# Altium PCB ACDC.PcbDoc
Units mm, origin at the board's own origin, x right, y up, seen from the top; angles counter-clockwise.
Board outline 50 x 50.95 mm, 2 copper layers (TOP, BOTTOM), stack 0.35 mm thick; 6 components, 33 nets, 164 pads, 32 vias.
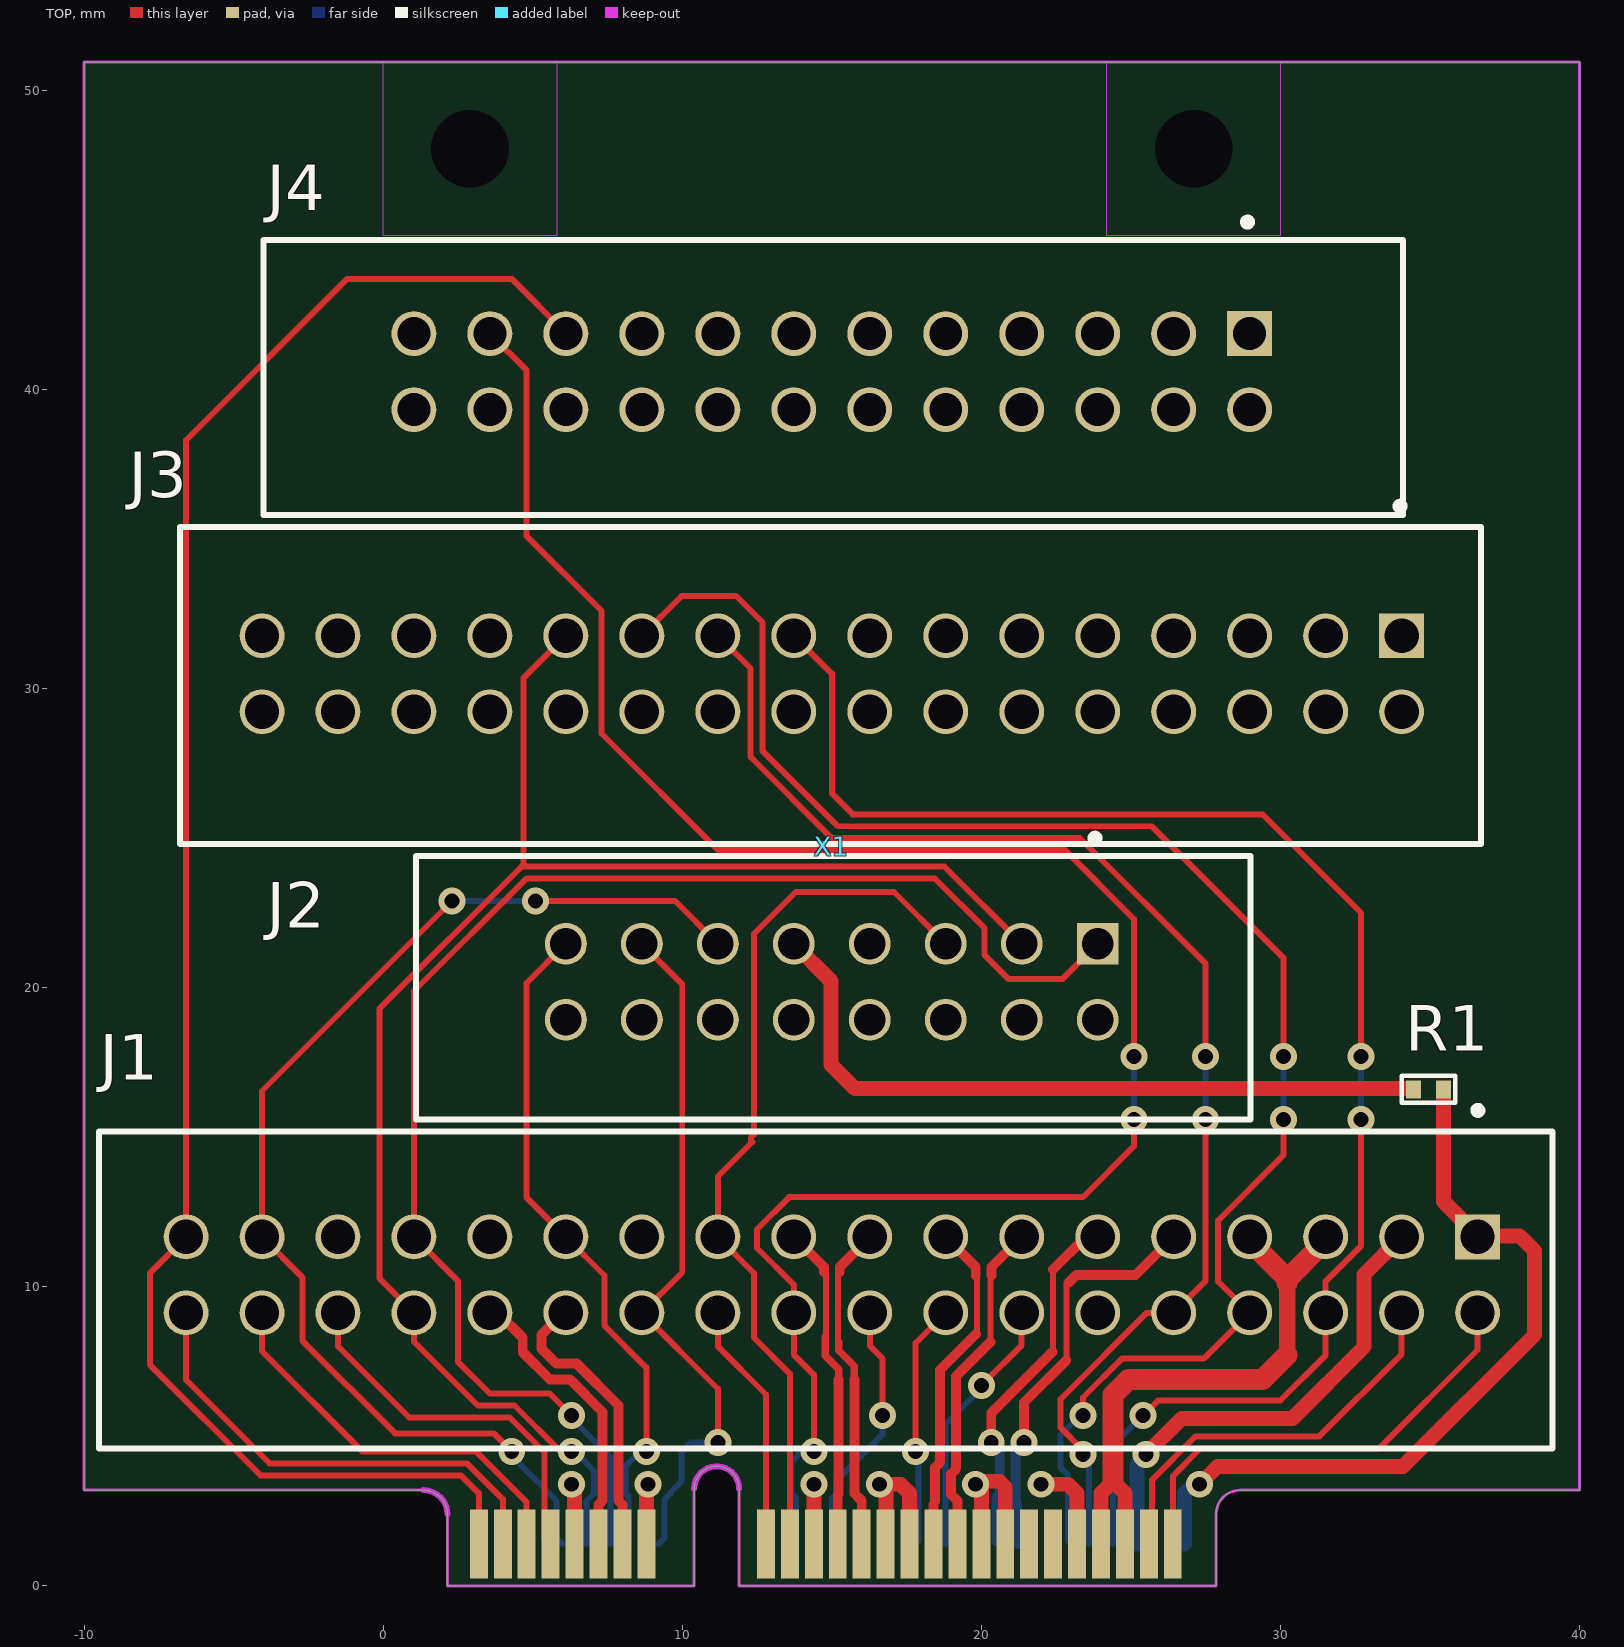
[diagram p0: TOP view]
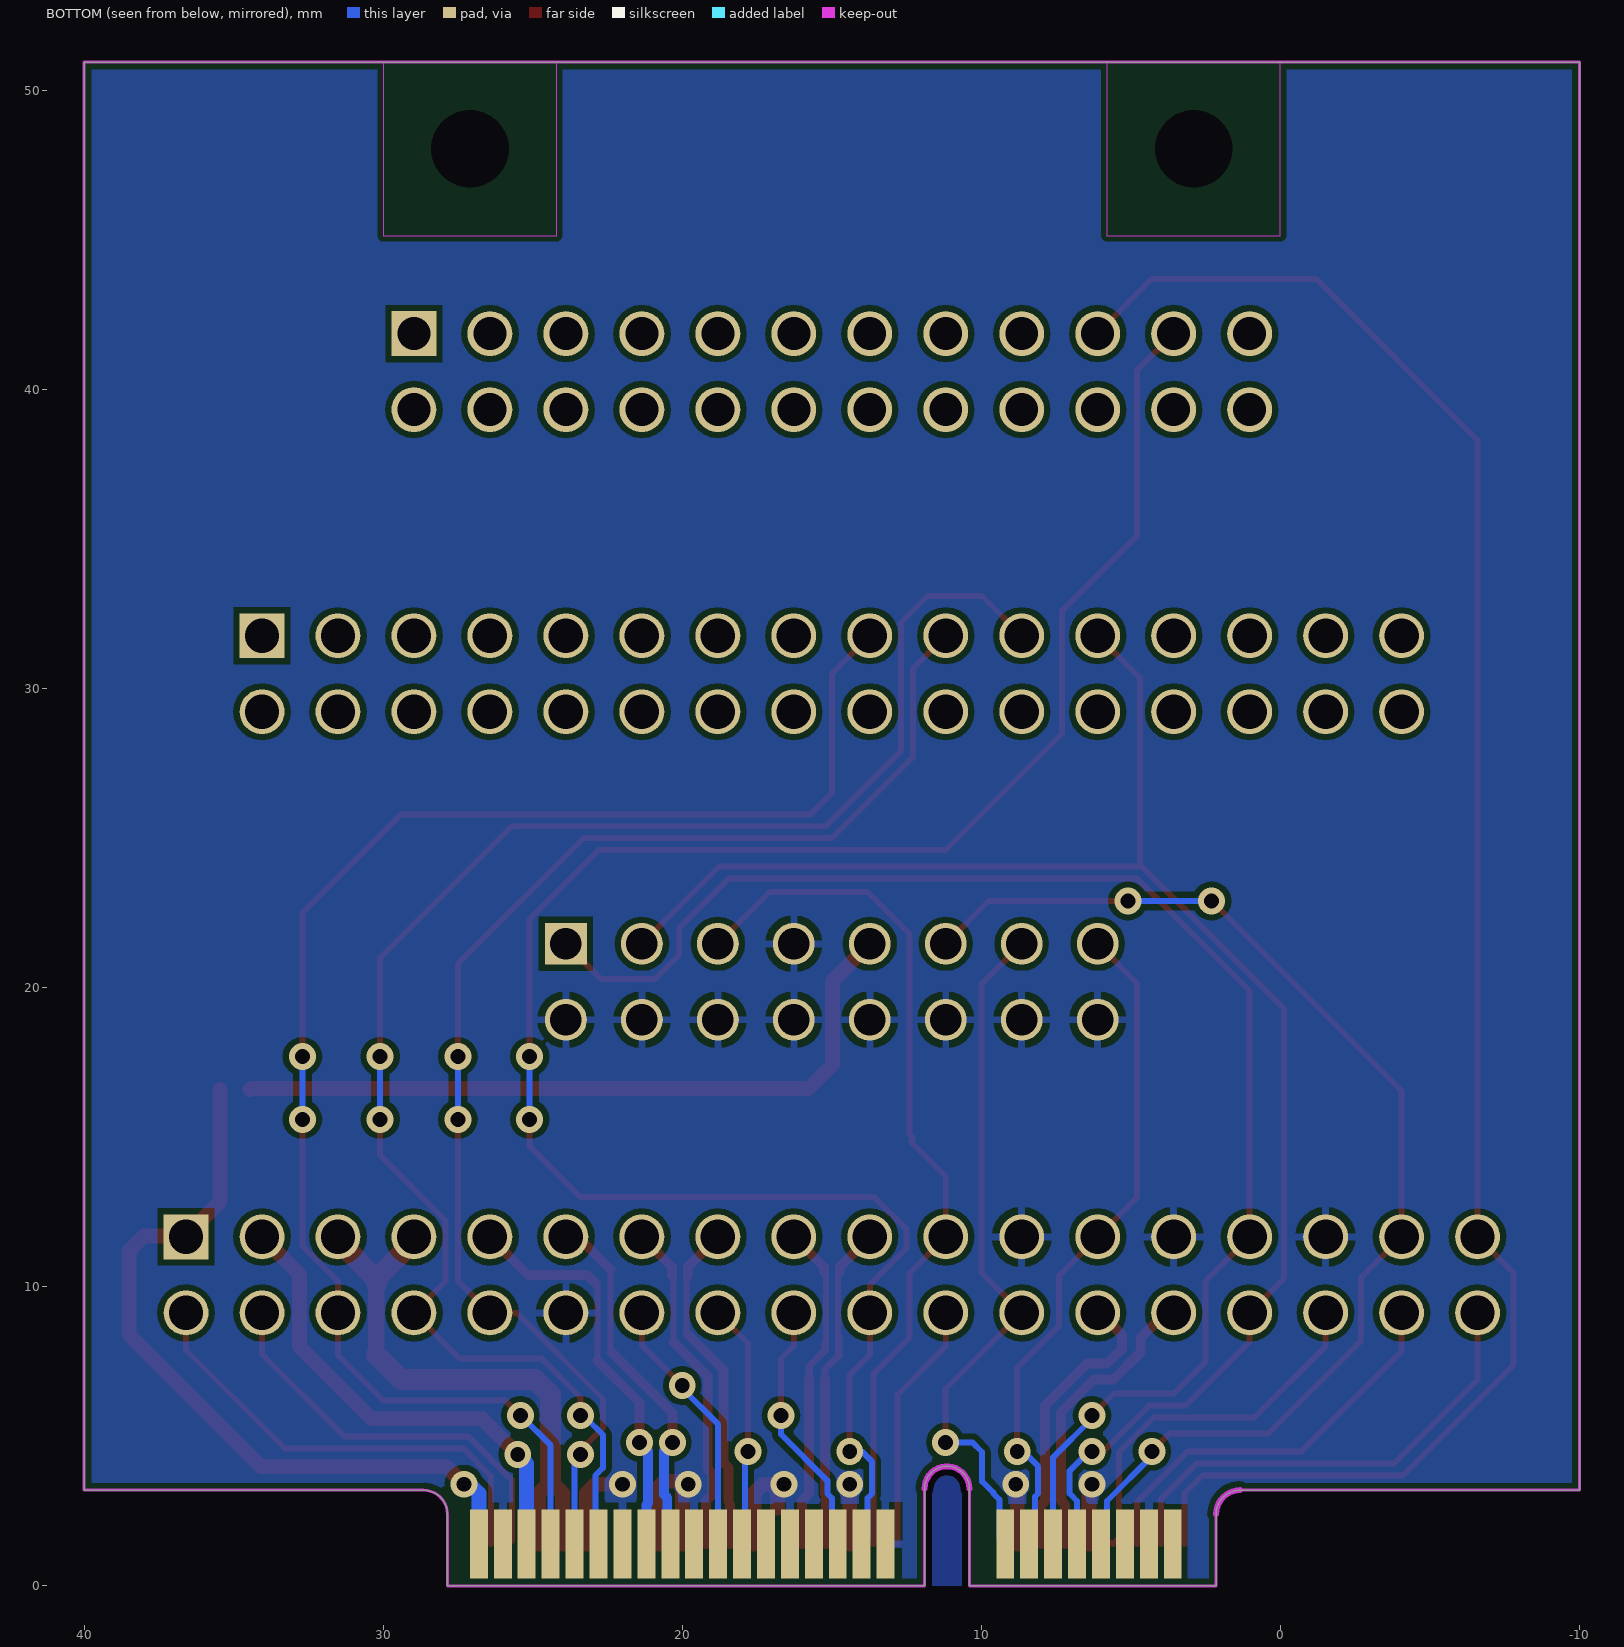
[diagram p1: BOTTOM view, seen from below]
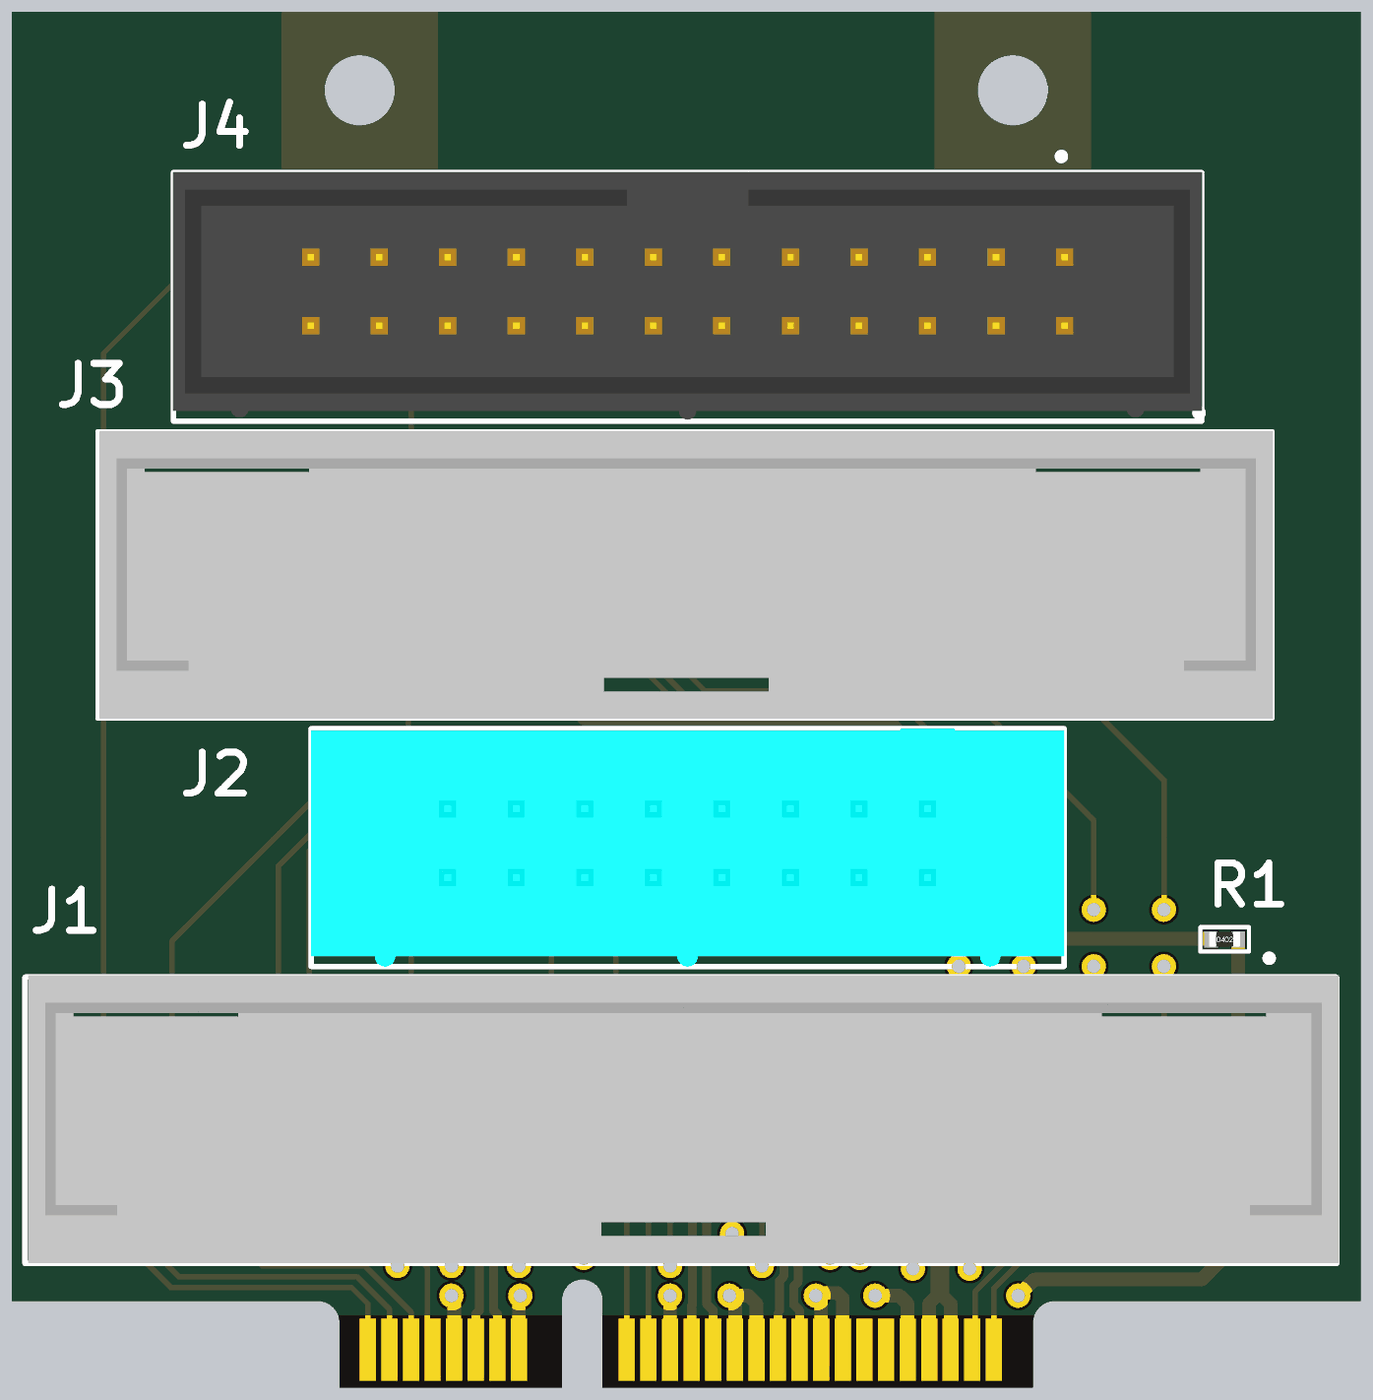
[diagram p2: 3D render of the assembled board from above, using the file's embedded part models]

## Layer stack, top to bottom
Top Solder: solder mask 0.0102, Solder Resist, Dk 3.5
TOP: signal copper 0.035
Dielectric: dielectric 0.28, Dk 4.2
BOTTOM: signal copper 0.035
Bottom Solder: solder mask 0.0102, Solder Resist, Dk 3.5

## Board outline
2.15,0 2.15,2.4 ccw(c1.35,2.4) 1.35,3.2 -10,3.2 -10,50.95 40,50.95 40,3.2 28.65,3.2 ccw(c28.65,2.4) 27.85,2.4 27.85,0 11.9,0 11.9,3.25 ccw(c11.15,3.25) 10.4,3.25 10.4,0

## Design rules (kind name [scope] priority, off if disabled: settings)
AcuteAngle [All] p1: minimum=6.00000000000000E+0001 checktracksonly=FALSE
Clearance Clearance_RF [InNetClass('50R')] p1: gap=0.4
Clearance Clearance_GPS [InNetClass('GPS')] p2: gap=0.2
Clearance [All] p3: gap=0.2
Clearance Clearance_keepout [(OnLayer('Keep-Out Layer'))] p4: gap=0.4
Clearance PolygonClearance [InNamedPolygon('5V0_L02_P032') vs InNamedPolygon('3V3_L02_P030')] p5: gap=0.3
ComponentClearance [All] p1: gap=0.15 collisioncheckmode=3 verticalgap=0.254 showdistances=FALSE
DiffPairsRouting DIFF90OHM [InNetClass('DIFF90')] p1: maxlimit=0.5 minlimit=0.2 mostfreqgap=0.2 toplayer_minwidth=0.2 toplayer_maxwidth=0.331 toplayer_prefwidth=0.331 bottomlayer_minwidth=0.2 bottomlayer_maxwidth=0.331 bottomlayer_prefwidth=0.331 maxuncoupledlength=12.7
MatchedLengths [InNetClass('DIFF90')] p1: tolerance=0.5 checknetsindiffpair=TRUE checkdiffpairvsdiffpair=FALSE checkxsignals=FALSE checkothers=FALSE
MatchedLengths USB_OTG_CON [InNetClass('USB_OTG_CON_D')] p2: tolerance=0.1 checknetsindiffpair=TRUE checkdiffpairvsdiffpair=FALSE checkxsignals=FALSE checkothers=FALSE
MatchedLengths USB_OTG_ESD [InNetClass('USB_OTG_ESD_D')] p3: tolerance=0.1 checknetsindiffpair=TRUE checkdiffpairvsdiffpair=FALSE checkxsignals=FALSE checkothers=FALSE
MatchedLengths USB_OTG_HS [InNetClass('USB_HS_D')] p4: tolerance=0.1 checknetsindiffpair=TRUE checkdiffpairvsdiffpair=FALSE checkxsignals=FALSE checkothers=FALSE
MatchedLengths USB_OTG_FS [InNetClass('USB_OTG_FS_D')] p5: tolerance=0.1 checknetsindiffpair=TRUE checkdiffpairvsdiffpair=FALSE checkxsignals=FALSE checkothers=FALSE
PlaneConnect [All] p1: planeconnectstyle=Relief reliefexpansion=0.5 reliefentries=4 reliefconductorwidth=0.25 reliefairgap=0.25
PolygonConnect MTHOLE [(HasFootprint('MTG300_600') OR HasFootprint('TP_SMD'))] p1: connectstyle=Direct reliefconductorwidth=0.254 reliefentries=4 polygonreliefangle="90 Angle" airgapwidth=0.254
PolygonConnect PAD_CONNECT [(InPadClass('All Pads'))] p2: connectstyle=Relief reliefconductorwidth=0.25 reliefentries=4 polygonreliefangle="90 Angle" airgapwidth=0.25
PolygonConnect VIA_CONNECT [All] p3: connectstyle=Direct reliefconductorwidth=0.25 reliefentries=4 polygonreliefangle="90 Angle" airgapwidth=0.25
RoomDefinition PCIExpressModule [InComponentClass('PCIExpressModule')] p1: confinementstyle=ConfineIn formatcopy=TRUE lockcomponents=FALSE outline -306.83,-273.323 -256.03,-273.323 -256.03,-247.923 -306.83,-247.923
RoutingVias [All] p1: holewidth=0.5 width=0.9 viastyle="Through Hole" minholewidth=0.5 minwidth=0.9 maxholewidth=3 maxwidth=5
SolderMaskExpansion [All] p1: expansion=0.102
Width 50ohm [InNetClass('50R')] p1: maxlimit=0.501 minlimit=0.151 preferedwidth=0.501 minimp=50.000000 maximp=50.000000 favimp=50.000000
Width [All] p2: maxlimit=5 minlimit=0.15 preferedwidth=0.151 minimp=50.000000 maximp=50.000000 favimp=50.000000
27 further rules are at their usual default settings.

## Classes and differential pairs
net class DIFF90: _USB_AUX_D_N _USB_AUX_D_P MPCI_AUX_CLK_N MPCI_AUX_CLK_P MPCI_AUX_RX_N MPCI_AUX_RX_P MPCI_AUX_TX_N MPCI_AUX_TX_P
differential pair _USB_AUX_D: +_USB_AUX_D_P -_USB_AUX_D_N
differential pair MPCI_AUX_CLK: +MPCI_AUX_CLK_P -MPCI_AUX_CLK_N
differential pair MPCI_AUX_RX: +MPCI_AUX_RX_P -MPCI_AUX_RX_N
differential pair MPCI_AUX_TX: +MPCI_AUX_TX_P -MPCI_AUX_TX_N

## Components (designator, comment, footprint, x,y, rotation, side; value= is the part's Value field where it differs from the comment)
J1 "Comment" HDR_2X18 15,10.4 r180 top locked
J2 "Comment" HDR_2X8 15,20.2 r180 top locked
J3 "Comment" HDR_2X16 15,30.5 r180 top locked
J4 "Comment" HDR_2X12 15,40.6 r180 top locked
R1 "0" RESC1005X06N 34.95,16.6 r0 top
X1 "Mini PCIe Board Edge" PCIeMini-Edge 0,3.2 r0 top locked

## Footprints (in the part's own frame and the unit in brackets; to place one, negate y for a bottom-side part, rotate by r counter-clockwise, add the part's x,y. Pads: shape width x height; smd on the part's side, far side on the other; paste and mask are expansions set on the pad)
HDR_2X8 [mm]
  rect 1.4x1.4 hole 1.05: 1(-8.89,-1.27)
  round 1.4 hole 1.05: 2(-8.89,1.27) 3(-6.35,-1.27) 4(-6.35,1.27) 5(-3.81,-1.27) 6(-3.81,1.27) 7(-1.27,-1.27) 8(-1.27,1.27) 9(1.27,-1.27) 10(1.27,1.27) 11(3.81,-1.27) 12(3.81,1.27) 13(6.35,-1.27) 14(6.35,1.27) 15(8.89,-1.27) 16(8.89,1.27)
  silkscreen extent -14,-4.92 13.9,4.6, body extent -14.01,-4.2 13.91,4.61, height 8.89
HDR_2X12 [mm]
  rect 1.5x1.5 hole 1.1: 1(-13.97,-1.27)
  round 1.5 hole 1.1: 2(-13.97,1.27) 3(-11.43,-1.27) 4(-11.43,1.27) 5(-8.89,-1.27) 6(-8.89,1.27) 7(-6.35,-1.27) 8(-6.35,1.27) 9(-3.81,-1.27) 10(-3.81,1.27) 11(-1.27,-1.27) 12(-1.27,1.27) 13(1.27,-1.27) 14(1.27,1.27) 15(3.81,-1.27) 16(3.81,1.27) 17(6.35,-1.27) 18(6.35,1.27) 19(8.89,-1.27) 20(8.89,1.27) 21(11.43,-1.27) 22(11.43,1.27) 23(13.97,-1.27) 24(13.97,1.27)
  silkscreen extent -19.1,-5.12 19,4.8, body extent -19.12,-4.42 19.02,4.75, height 8.86
HDR_2X16 [mm]
  rect 1.5x1.5 hole 1.15: 1(-19.05,-1.27)
  round 1.5 hole 1.15: 2(-19.05,1.27) 3(-16.51,-1.27) 4(-16.51,1.27) 5(-13.97,-1.27) 6(-13.97,1.27) 7(-11.43,-1.27) 8(-11.43,1.27) 9(-8.89,-1.27) 10(-8.89,1.27) 11(-6.35,-1.27) 12(-6.35,1.27) 13(-3.81,-1.27) 14(-3.81,1.27) 15(-1.27,-1.27) 16(-1.27,1.27) 17(1.27,-1.27) 18(1.27,1.27) 19(3.81,-1.27) 20(3.81,1.27) 21(6.35,-1.27) 22(6.35,1.27) 23(8.89,-1.27) 24(8.89,1.27) 25(11.43,-1.27) 26(11.43,1.27) 27(13.97,-1.27) 28(13.97,1.27) 29(16.51,-1.27) 30(16.51,1.27) 31(19.05,-1.27) 32(19.05,1.27)
  silkscreen extent -21.7,-5.72 21.8,5.7, body extent -21.74,-4.93 21.74,5.73, height 12.08
HDR_2X18 [mm]
  rect 1.5x1.5 hole 1.15: 1(-21.59,-1.27)
  round 1.5 hole 1.15: 2(-21.59,1.27) 3(-19.05,-1.27) 4(-19.05,1.27) 5(-16.51,-1.27) 6(-16.51,1.27) 7(-13.97,-1.27) 8(-13.97,1.27) 9(-11.43,-1.27) 10(-11.43,1.27) 11(-8.89,-1.27) 12(-8.89,1.27) 13(-6.35,-1.27) 14(-6.35,1.27) 15(-3.81,-1.27) 16(-3.81,1.27) 17(-1.27,-1.27) 18(-1.27,1.27) 19(1.27,-1.27) 20(1.27,1.27) 21(3.81,-1.27) 22(3.81,1.27) 23(6.35,-1.27) 24(6.35,1.27) 25(8.89,-1.27) 26(8.89,1.27) 27(11.43,-1.27) 28(11.43,1.27) 29(13.97,-1.27) 30(13.97,1.27) 31(16.51,-1.27) 32(16.51,1.27) 33(19.05,-1.27) 34(19.05,1.27) 35(21.59,-1.27) 36(21.59,1.27)
  silkscreen extent -24.1,-5.62 24.5,5.8, body extent -24.18,-4.87 24.38,5.8, height 12.08
PCIeMini-Edge [mm]
  rect 0.6x2.3 smd paste-0.9: 1(3.2,-1.8) 3(4,-1.8) 5(4.8,-1.8) 7(5.6,-1.8) 9(6.4,-1.8) 11(7.2,-1.8) 13(8,-1.8) 15(8.8,-1.8) 17(12.8,-1.8) 19(13.6,-1.8) 21(14.4,-1.8) 23(15.2,-1.8) 25(16,-1.8) 27(16.8,-1.8) 29(17.6,-1.8) 31(18.4,-1.8) 33(19.2,-1.8) 35(20,-1.8) 37(20.8,-1.8) 39(21.6,-1.8) 41(22.4,-1.8) 43(23.2,-1.8) 45(24,-1.8) 47(24.8,-1.8) 49(25.6,-1.8) 51(26.4,-1.8)
  rect 0.6x2.3 smd far side paste-0.9: 2(3.6,-1.8) 4(4.4,-1.8) 6(5.2,-1.8) 8(6,-1.8) 10(6.8,-1.8) 12(7.6,-1.8) 14(8.4,-1.8) 16(9.2,-1.8) 18(13.2,-1.8) 20(14,-1.8) 22(14.8,-1.8) 24(15.6,-1.8) 26(16.4,-1.8) 28(17.2,-1.8) 30(18,-1.8) 32(18.8,-1.8) 34(19.6,-1.8) 36(20.4,-1.8) 38(21.2,-1.8) 40(22,-1.8) 42(22.8,-1.8) 44(23.6,-1.8) 46(24.4,-1.8) 48(25.2,-1.8) 50(26,-1.8) 52(26.8,-1.8)
  round 2.3 hole 2.6 unplated: MH1(2.9,44.85) MH2(27.1,44.85)
  Keep-Out Layer region: 5.8,41.95 0,41.95 0,47.75 5.8,47.75 hole: 2.9,46.161 2.561,46.117 2.244,45.986 1.973,45.777 1.764,45.506 1.633,45.189 1.589,44.85 1.633,44.511 1.764,44.194 1.973,43.923 2.244,43.714 2.561,43.583 2.9,43.539 3.239,43.583 3.556,43.714 3.827,43.923 4.036,44.194 4.167,44.511 4.211,44.85 4.167,45.189 4.036,45.506 3.827,45.777 3.556,45.986 3.239,46.117
  Keep-Out Layer region: 24.2,41.95 24.2,47.75 30,47.75 30,41.95 hole: 28.411,44.85 28.367,45.189 28.236,45.506 28.027,45.777 27.756,45.986 27.439,46.117 27.1,46.161 26.761,46.117 26.444,45.986 26.173,45.777 25.964,45.506 25.833,45.189 25.789,44.85 25.833,44.511 25.964,44.194 26.173,43.923 26.444,43.714 26.761,43.583 27.1,43.539 27.439,43.583 27.756,43.714 28.027,43.923 28.236,44.194 28.367,44.511
RESC1005X06N [mm] "Chip Resistor, 2-Leads, Body 1,00x0,50mm, IPC Low Density"
  rect 0.5x0.6 smd mask+0.05: 1(-0.5,0) 2(0.5,0)
  silkscreen extent -0.9,-0.45 0.9,0.45, body extent -0.57,-0.27 0.58,0.28, height 0.41

## Part data
J1: library part CON_2X18
J2: library part CON_2X8
J3: library part CON_2X16
J4: library part CON_2X12
R1: library part RESC1005_0R00_5%, "RES SMD 0.0OHM JUMPER 1/16W 0402"
X1: library part CON_MPIE_EDGE

## Via types
v1: diameter 0.9, hole 0.5, TOP to BOTTOM, 32 vias

## Nets (pads, with @x,y where several pads share a name; then routed paths per layer and width w, separated by ;. In a path a pad name is that pad's centre, name@x,y a point inside that pad or via, vN(x,y) a via of type N, cw(c..) or ccw(c..) an arc to the next point about the centre after c; other vN are vias at no path point)
1V5_PCI: J1.3 X1.48 | length 16.1
  TOP w0.5: v1(25.5,4.4) 26.7,5.6 30.4,5.6 32.8,8 32.8,10.42 J1.3
  BOTTOM w0.5: X1.48 25.2,4.1 v1(25.5,4.4)
3V3_PCIE_CON_AUX: J1.1 R1.2 X1.52 | length 25.9
  TOP w0.5: v1(27.3,3.4) 27.9,4 34.1,4 38.5,8.4 38.5,11.2 38,11.7 J1.1@36.6,11.7 ; R1.2 35.45,12.85 J1.1@36.6,11.7 ; J1.1 36.6,11.68 J1.1@36.6,11.7
  BOTTOM w0.5: X1.52 26.8,3.1 27.1,3.4 v1(27.3,3.4)
5V_PCIE_CON_AUX: J1.5 J1.7 X1.45 X1.47 | length 19.8
  TOP w0.5: X1.45 24,3.1 24.4,3.5 24.8,3.1 X1.47
  TOP w0.55: 30.225,7.725 30.225,10.125
  TOP w0.7: 24.4,3.5 24.4,6.381 24.919,6.9 29.4,6.9 30.225,7.725 ; J1.7@28.97,11.53 30.225,10.275 30.225,10.125 ; 30.3,10.329 31.381,11.41 J1.5@31.51,11.41
_USB_AUX_D_N: J1.11 X1.36 | length 12.1
  TOP w0.2: 22.4,7.824 22.4,10.58 22.4,10.625
  TOP w0.331: v1(20.331,4.8) 20.331,5.782 22.373,7.824 ; 22.4,10.58 23.49,11.67 J1.11
  BOTTOM w0.331: v1(20.331,4.8) 20.616,4.516 20.616,3.062 20.5,2.947 X1.36@20.5,1.5
_USB_AUX_D_P: J1.9 X1.38 | length 13.7
  TOP w0.2: 22.84,7.54 22.84,10.065 22.907,10.132
  TOP w0.331: v1@21.5,4.869 v1(21.431,4.8) 21.431,6.131 22.84,7.54 ; 22.907,10.132 23.175,10.4 25.16,10.4 J1.9
  BOTTOM w0.331: X1.38 21.2,2.715 21.147,2.769 21.147,4.515 v1(21.431,4.8)
AUX_GPS_1PPS: J1.22 X1.17 | length 8.4
  TOP w0.2: J1.22 11.19,8.01 12.8,6.4 X1.17
CLKREQ#: J1.32 X1.7 | length 12.7
  TOP w0.2: J1.32 -1.51,8.01 0.865,5.635 4.226,5.635 5.4,4.461 5.4,1.6 X1.7 X1.7@5.65,1.45
COEX1: J1.36 X1.3 | length 16
  TOP w0.2: J1.36 -6.59,6.89 -3.8,4.1 2.8,4.1 4,2.9 X1.3
COEX2: J1.34 X1.5 | length 13.6
  TOP w0.2: J1.34 -4.05,7.85 -0.7,4.5 3.1,4.5 4.8,2.8 X1.5
GND: J1.12 J1.23 J1.27 J1.31 J2.2 J2.4 J2.6 J2.7 J2.8 J2.10 J2.12 J2.14 J2.16 X1.4 X1.9 X1.15 X1.18 X1.21 X1.26 X1.27 X1.29 X1.34 X1.35 X1.37 X1.40 X1.43 X1.50 | length 17.6
  TOP w0.25: v1@6.35,3.6 v1@6.4,3.55
  TOP w0.3: X1.29 X1.29@17.7,1.5 ; X1.43 X1.43@23.3,1.5
  TOP w0.5: X1.9 v1@6.4,3.5 ; X1.15 8.8,3.4 v1@8.9,3.5 ; X1.21 v1@14.4,3.5 ; v1(16.6,3.4) 17.3,3.4 17.6,3.1 X1.29 ; 16.815,2.6 v1@16.815,3.185 ; X1.35 v1@20,3.2 ; v1@20.1,3.5 20.6,3.5 20.8,3.3 X1.37 ; v1(22,3.4) 22.9,3.4 23.2,3.1 X1.43
  other v1: 6.3,3.4 8.85,3.4 14.4,3.4 19.8,3.4
IMX6_PCIE_GPIO0/SDIO_DAT3: J1.30 J2.3 J3.23 X1.10 | length 54.8
  TOP w0.2: 4.7,24.05 4.7,30.36 J3.23 ; v1@6.4,4.5 v1(6.3,4.5) 5.926,4.5 4.392,6.035 3.165,6.035 1.03,8.17 J1.30 -0.116,10.276 -0.116,19.31 4.624,24.05 18.77,24.05 J2.3
  BOTTOM w0.2: v1@6.4,4.5 7.05,3.85 7.05,3.089 6.8,2.839 X1.10
IMX6_PCIE_GPIO1: J1.8 J3.21 X1.42 | length 54.7
  TOP w0.2: J3.21 9.98,33.1 11.8,33.1 12.688,32.212 12.68,32.205 12.68,27.92 15.2,25.4 25.7,25.4 30.1,21 v1(30.1,17.7) ; v1@23.4,5.6 23.4,6.3 24.7,7.6 27.44,7.6 J1.8 27.92,10.18 27.92,12.22 30.1,14.4 v1(30.1,15.6)
  BOTTOM w0.2: X1.42@22.9,1.5 22.9,3.7 22.65,3.95 22.65,5.05 23.2,5.6 v1@23.4,5.6 ; v1@30.1,15.7 v1(30.1,17.7)
  other v1: 23.4,5.7
IMX6_PCIE_GPIO2/IMX6_UART1_TX: J1.10 J3.19 X1.44 | length 44.9
  TOP w0.2: J3.19 12.28,30.68 12.28,27.72 15,25 23.3,25 27.5,20.8 v1(27.5,17.7) ; v1(23.4,4.4) 23.4,4.539 22.65,5.289 22.65,6.25 25.53,9.13 J1.10 27.5,10.2 v1@27.5,15.7
  BOTTOM w0.2: v1(23.4,4.4) 23.6,4.2 X1.44 ; v1@27.5,15.7 v1(27.5,17.7)
  other v1: 27.5,15.6
IMX6_PCIE_GPIO3/IMX6_UART1_RX: J1.6 J3.17 X1.46 | length 52.1
  TOP w0.2: J3.17 15,30.5 15,26.5 15.7,25.8 29.4,25.8 32.7,22.5 v1(32.7,17.7) ; v1(25.412,5.7) 25.912,6.2 30,6.2 31.51,7.71 J1.6 31.51,10.185 32.7,11.375 v1(32.7,15.6)
  BOTTOM w0.2: X1.46 24.4,4.7 25.4,5.7 v1(25.412,5.7) ; v1(32.7,15.6) v1(32.7,17.7)
IMX6_SPI0_CLK/SDIO_DAT2: J1.29 J2.1 X1.12 | length 49.1
  TOP w0.2: v1(6.3,5.7) 5.565,6.435 3.565,6.435 2.5,7.5 2.5,10.2 J1.29 1.03,19.891 4.789,23.65 18.45,23.65 20.1,22 20.1,21.1 20.9,20.3 22.72,20.3 J2.1
  BOTTOM w0.2: v1@6.3,5.6 7.6,4.3 X1.12
IMX6_SPI0_CS/SDIO_DAT0: J1.24 J2.13 X1.16 | length 23.6
  TOP w0.2: J2.13 10,20.12 10,10.48 J1.24 11.18,6.6 11.2,6.6 v1(11.2,4.8)
  BOTTOM w0.2: X1.16 9.4,1.6 9.4,2.889 9.6,3.089 9.6,3.123 9.977,3.5 9.977,4.477 10.3,4.8 v1(11.2,4.8)
IMX6_SPI0_MISO/SDIO_DAT1: J1.25 J2.15 X1.14 | length 22.8
  TOP w0.2: J2.15 4.8,20.16 4.8,12.98 J1.25 7.4,10.38 7.4,8.7 8.8,7.3 v1(8.8,4.5)
  BOTTOM w0.2: X1.14@8.2,1.4 8.2,2.989 8.1,3.089 8.1,4 8.7,4.6 v1@8.8,4.6
IMX6_SPI0_MOSI/SDIO_CLK: J1.33 J2.11 X1.8 | length 39.7
  TOP w0.2: v1(2.3,22.9) -4.05,16.55 J1.33 -2.7,10.32 -2.7,8.2 0.4,5.1 3.7,5.1 v1(4.3,4.5) ; v1(5.1,22.9) 9.76,22.9 J2.11
  BOTTOM w0.2: v1(2.3,22.9) v1(5.1,22.9) ; v1(4.3,4.5) 4.3,4.339 5.8,2.839 5.8,1.6 X1.8
MPCI_AUX_CLK_N: J1.28 X1.11 | length 9.9
  TOP w0.331: J1.28 3.839,9.13 4.669,8.3 4.669,7.811 5.58,6.9 6.253,6.9 7.335,5.819 7.335,2.85 7.2,2.715 X1.11
MPCI_AUX_CLK_P: J1.26 X1.13 | length 9.6
  TOP w0.331: J1.26 6.03,9.13 5.3,8.4 5.3,7.931 5.8,7.431 6.473,7.431 7.866,6.039 7.866,2.85 8,2.715 X1.13
MPCI_AUX_DISABLE#: J1.20 J4.21 X1.20 | length 68.3
  TOP w0.2: J4.21 4.8,40.64 4.8,35.1 7.3,32.6 7.3,28.5 11.2,24.6 22.8,24.6 25.1,22.3 v1(25.1,17.7) ; v1(14.4,4.5) 14.4,7.066 13.73,7.736 J1.20 13.73,10.07 12.5,11.3 12.5,11.925 13.575,13 23.4,13 25.1,14.7 v1(25.1,15.6)
  BOTTOM w0.2: X1.20@13.8,1.6 13.8,2.939 13.65,3.089 13.65,4.15 14,4.5 v1(14.4,4.5) ; v1@25.1,15.7 v1(25.1,17.7)
MPCI_AUX_RX_N: J1.19 X1.23 | length 11
  TOP w0.2: 14.8,8.361 14.8,10.6
  TOP w0.25: 14.775,8.336 14.775,7.7 15.227,7.248 15.227,6.897
  TOP w0.331: J1.19 14.734,10.666 14.734,10.5 ; X1.23 15.2,3.047 15.227,3.073 15.227,6.897
MPCI_AUX_RX_P: J1.17 X1.25 | length 11.1
  TOP w0.2: 15.2,8.1 15.2,10.525
  TOP w0.25: 15.225,8.15 15.225,7.886 15.758,7.354 15.758,6.9
  TOP w0.331: 15.265,10.5 15.265,10.665 J1.17 ; 15.758,6.9 15.758,3.089 16,2.847 X1.25
MPCI_AUX_S_RESET#: J1.18 X1.22 | length 8.4
  TOP w0.2: J1.18 16.27,8.03 16.7,7.6 v1(16.7,5.7)
  BOTTOM w0.2: X1.22@15,1.6 15,2.939 15.15,3.089 15.15,3.522 16.7,5.072 v1(16.7,5.7)
MPCI_AUX_S_WAKE#: J1.35 J4.19 X1.1 | length 61.6
  TOP w0.2: X1.1 3.2,3.1 2.6,3.7 -4.1,3.7 -7.8,7.4 -7.8,10.46 J1.35 -6.59,38.31 -1.2,43.7 4.3,43.7 6.11,41.89 J4.19
MPCI_AUX_SCK: J1.16 X1.30 | length 8
  TOP w0.2: v1(17.8,4.5) 17.8,8.12 J1.16
  BOTTOM w0.2: X1.30@17.9,1.5 v1@17.9,4.5
MPCI_AUX_SDA: J1.14 X1.32 | length 8.8
  TOP w0.2: v1(20,6.7) 21.35,8.05 J1.14
  BOTTOM w0.2: X1.32 18.8,5.4 20,6.6 v1(20,6.7)
MPCI_AUX_TX_N: J1.15 X1.31 | length 11.1
  TOP w0.2: 19.825,10.357 19.86,10.322 19.86,8.429
  TOP w0.331: X1.31 18.4,2.715 ; 18.453,2.842 18.453,3.958 18.6,4.104 18.6,4.147 18.616,4.162 18.616,7.22 19.825,8.429 ; J1.15 19.814,10.666 19.814,10.375
MPCI_AUX_TX_P: J1.13 X1.33 | length 11.4
  TOP w0.2: 20.3,8.153 20.3,10.5
  TOP w0.331: X1.33 19.2,2.847 18.984,3.062 18.984,3.738 19.131,3.884 19.131,3.927 19.147,3.942 19.147,7 20.3,8.153 ; 20.345,10.375 20.345,10.665 J1.13
NetJ2_9: J2.9 R1.1 | length 24.4
  TOP w0.5: J2.9 14.975,20.225 14.975,17.425 15.775,16.625 34.425,16.625 R1.1
SATA1_MSATA_ACT#: J1.4 X1.49 | length 13.5
  TOP w0.2: X1.49@25.7,1.5 25.7,3.539 27.161,5 31.3,5 34.05,7.75 J1.4
SATA1_MSATA_PREDET#: J1.2 X1.51 | length 15.5
  TOP w0.2: X1.51 26.4,3.674 27.326,4.6 33.3,4.6 36.59,7.89 J1.2
SDIO_CMD: J1.21 J2.5 X1.19 | length 29.6
  TOP w0.2: X1.19 13.6,7.1 12.4,8.3 12.4,10.46 J1.21 11.19,13.69 12.35,14.85 12.3,14.9 12.3,15 12.4,15.1 12.4,21.8 13.8,23.2 17.08,23.2 J2.5
pads on no net: J3.1 J3.2 J3.3 J3.4 J3.5 J3.6 J3.7 J3.8 J3.9 J3.10 J3.11 J3.12 J3.13 J3.14 J3.15 J3.16 J3.18 J3.20 J3.22 J3.24 J3.25 J3.26 J3.27 J3.28 J3.29 J3.30 J3.31 J3.32 J4.1 J4.2 J4.3 J4.4 J4.5 J4.6 J4.7 J4.8 J4.9 J4.10 J4.11 J4.12 J4.13 J4.14 J4.15 J4.16 J4.17 J4.18 J4.20 J4.22 J4.23 J4.24 X1.2 X1.6 X1.24 X1.28 X1.39 X1.41 X1.MH1 X1.MH2

## Polygon pours and split planes (outlines as drawn)
GND on BOTTOM "BOTTOM-GND" (solid, pour order 0): 30,50.95 30,45.15 24.2,45.15 24.2,50.95 5.8,50.95 5.8,45.15 0,45.15 0,50.95 -9.95,50.95 -10,50.9 -10,3.2 1.6,3.2 2.2,2.6 2.2,0.05 2.15,0 27.85,0 27.85,2.65 27.9,2.7 28.4,3.2 28.4,3.3 40,3.3 40,50.9 30.05,50.9 30,50.95

## Keep-outs
Keep-Out Layer:
  the board outline again, w0.2
  text ".Layer_Name" at 38.2,-54.3 h1.5

## Other copper
TOP:
  text ".Layer_Name" at 38.2,-54.3 h1.5
BOTTOM:
  text ".Layer_Name" at 38.2,-54.3 h1.5

## Silkscreen, mask and mechanical layers (free items; w line width, h text height)
Top Overlay:
  text ".Layer_Name" at 38.2,-54.3 h1.5
Bottom Overlay:
  text ".Layer_Name" at 38.2,-54.3 h1.5
Top Paste:
  text ".Layer_Name" at 38.2,-54.3 h1.5
Bottom Paste:
  text ".Layer_Name" at 38.2,-54.3 h1.5
Top Solder:
  text ".Layer_Name" at 38.2,-54.3 h1.5
Bottom Solder:
  text ".Layer_Name" at 38.2,-54.3 h1.5
Drill Guide:
  text ".Layer_Name" at 38.2,-54.3 h1.5
BoardOutline:
  the board outline again, w0.2
  text ".Layer_Name" at 38.2,-54.3 h1.5
NCRoutePath:
  text ".Layer_Name" at 38.2,-54.3 h1.5
TitleBox:
  circle w0.254: c-41.9,-74.3 r1
  circle w0.254: c-33.9,-78.3 r1
  circle w0.254: c-33.9,-70.3 r1
  lines w0.254: -47.8,-61.3 82.2,-61.3 ; -47.8,-56.3 82.2,-56.3 ; -47.8,-51.3 82.2,-51.3 ; -47.8,-46.3 82.2,-46.3 ; -22.8,-61.3 -22.8,-46.777 ; 27.2,-61.3 27.2,-45.877 ; -47.8,-91.3 82.2,-91.3 82.2,-32.277 -47.8,-32.277 -47.8,-91.3
  lines w0.3: -41.803,-75.281 ccw(c-36.9,-74.3) -34.824,-78.848 ; -41.799,-73.3 cw(c-36.9,-74.3) -34.786,-69.769 ; -33.125,-71.022 cw(c-36.9,-74.3) -33.118,-77.571
  text ".ProjectName" at -45.57,-37.077 h2.5
  text "Created By PCB Design Ltd for .Company" at -45.77,-43.277 h2.5
  text ".Pcb_File_Name_No_Path" at -20.77,-49.277 h1.5
  text "PCB Name" at 29.23,-49.277 h1.5
  text ".PCBName" at 42.23,-49.277 h1.5
  text ".Pcbrevision" at 50.3,-49.3 h1.5
  text "File Name" at -43.37,-49.677 h1.5
  text "SVN Revision" at -43.77,-54.277 h1.5
  text ".VersionControl_RevNumber" at -20.77,-54.277 h1.5
  text "LAYER:" at 29.2,-54.3 h1.5
  text ".Print_Date" at 42.23,-59.277 h1.5
  text "Board Designer" at -43.8,-59.3 h1.5
  text ".ProjectDrawnBy" at -20.8,-59.3 h1.5
  text "DATE:" at 29.2,-59.3 h1.5
  text ".Print_Time" at 54.9,-59.3 h1.5
  text "RESTRICTION NOTICE" at 17.319,-66.973 h1.5
  text "THIS PCB ARTWORK CONTAINS INFORMATION WHICH IS PROPRIETARY TO AND IS THE PROPERTY" at -23.681,-72.473 h1.5
  text "PCB" at -38.9,-73.8 h1.52
  text "DESIGN" at -39.4,-75.8 h1
  text "OF .Company, AND MAY NOT BE USED, REPRODUCED OR DISCLOSED IN" at -14.681,-76.973 h1.5
  text "ANY MANNER WITHOUT EXPRESSED WRITTEN PERMISSION FROM .Company." at -14.681,-81.473 h1.5
  text "www.pcbdesign.hu" at -45.3,-83.4 h1.5
  text "C 2016 .Company" at 15,-87.3 h1.5
TitleBoxMirror:
  circle w0.254: c76.3,-74.3 r1
  circle w0.254: c68.3,-78.3 r1
  circle w0.254: c68.3,-70.3 r1
  lines w0.254: -47.8,-61.3 82.2,-61.3 ; -47.8,-56.3 82.2,-56.3 ; -47.8,-51.3 82.2,-51.3 ; -47.8,-46.3 82.2,-46.3 ; 7.2,-61.3 7.2,-45.877 ; 57.2,-61.3 57.2,-46.777 ; -47.8,-91.3 -47.8,-32.277 82.2,-32.277 82.2,-91.3 -47.8,-91.3
  lines w0.3: 67.518,-77.571 cw(c71.3,-74.3) 67.525,-71.022 ; 69.186,-69.769 cw(c71.3,-74.3) 76.199,-73.3 ; 69.224,-78.848 ccw(c71.3,-74.3) 76.203,-75.281
  text ".ProjectName" at 79.97,-37.077 h2.5
  text "Created By PCB Design Ltd for .Company" at 80.17,-43.277 h2.5
  text ".PCBName" at -7.83,-49.277 h1.5
  text "PCB Name" at 5.17,-49.277 h1.5
  text ".Pcb_File_Name_No_Path" at 55.17,-49.277 h1.5
  text ".pcbrevision" at -15.9,-49.3 h1.5
  text "File Name" at 77.77,-49.677 h1.5
  text ".VersionControl_RevNumber" at 55.17,-54.277 h1.5
  text "SVN Revision" at 78.17,-54.277 h1.5
  text "LAYER:" at 5.2,-54.3 h1.5
  text ".Print_Date" at -7.83,-59.277 h1.5
  text ".print_Time" at -20,-59.3 h1.5
  text "DATE:" at 5.2,-59.3 h1.5
  text ".ProjectDrawnBy" at 55.2,-59.3 h1.5
  text "Board Designer" at 78.2,-59.3 h1.5
  text "RESTRICTION NOTICE" at 17.081,-66.973 h1.5
  text "THIS PCB ARTWORK CONTAINS INFORMATION WHICH IS PROPRIETARY TO AND IS THE PROPERTY" at 58.081,-72.473 h1.5
  text "PCB" at 73.3,-73.8 h1.52
  text "DESIGN" at 73.8,-75.8 h1
  text "OF .Company, AND MAY NOT BE USED, REPRODUCED OR DISCLOSED IN" at 49.081,-76.973 h1.5
  text "ANY MANNER WITHOUT EXPRESSED WRITTEN PERMISSION FROM .Company." at 49.081,-81.473 h1.5
  text "www.pcbdesign.hu" at 79.7,-83.4 h1.5
  text "C 2016 .Company" at 19.4,-87.3 h1.5
StackupDetail:
  lines w0.254: 140.374,-32.8 190.874,-32.8 ; 140.374,-32.3 190.874,-32.3 ; 140.374,-31.8 190.874,-31.8 ; 140.374,-31.3 190.874,-31.3 ; 145.374,-30.8 145.374,-28.3 147.874,-28.3 152.874,-28.3 152.874,-30.8 ; 145.474,-33.4 145.474,-35.9 152.974,-35.9 152.974,-33.4 ; 147.874,-33.3 150.374,-33.3 155.374,-33.3 ; 160.374,-30.8 160.374,-28.3 175.374,-28.3 175.374,-30.8 140.374,-30.8 ; 160.474,-33.4 160.474,-35.9 175.474,-35.9 175.474,-33.4 ; 162.874,-33.3 177.874,-33.3 ; 165.374,-28.3 170.374,-28.3 ; 167.874,-33.3 172.874,-33.3 ; 175.374,-33.3 140.374,-33.3 ; 180.374,-33.3 185.374,-33.3 ; 180.474,-33.4 180.474,-35.9 185.474,-35.9 185.474,-33.4 ; 182.874,-33.3 187.874,-33.3 ; 190.374,-33.3 140.374,-33.3 ; 140.374,-33.3 140.374,-30.8 ; 140.374,-33.3 190.874,-33.3 190.874,-30.8 140.374,-30.8 ; 180.374,-30.8 180.374,-28.3 185.374,-28.3 185.374,-30.8 180.374,-30.8
  text "Note: Solder Mask is not depicted" at 147.374,-18 h1.5
  text "LAYER STACKUP" at 100.75,-18.715 h3
  text "TOP" at 100.174,-28.625 h1.5
  text "18(35) um" at 130.374,-29.8 h1.5
  text "Core - 1000 um" at 193.9,-32.2 h1.5
  text "18(35) um" at 130.6,-36 h1.5
  text "BOTTOM" at 100.574,-36.575 h1.5
  text ".Layer_Name" at 38.2,-54.3 h1.5
Fabrication Notes:
  lines w0.254: -86.83,-66.123 -76.83,-66.123 ; -86.83,-16.123 -76.83,-16.123 ; -86.83,33.877 -76.83,33.877 ; -86.83,83.877 -76.83,83.877 ; -26.83,-116.123 -26.83,-121.123 ; -26.83,133.877 -26.83,138.877 ; 23.17,-121.123 23.17,-116.123 ; 73.17,-121.123 73.17,-116.123 ; 123.17,-121.123 123.17,-116.123 ; 123.17,-108.623 223.17,-108.623 ; 123.17,-101.123 223.17,-101.123 ; 173.17,-121.123 173.17,-116.123 ; 173.17,133.877 173.17,138.877 ; 193.17,-116.123 193.17,-108.623 ; 223.17,-66.123 233.17,-66.123 ; 223.17,-16.123 233.17,-16.123 ; -26.83,-121.123 -86.83,-121.123 -86.83,138.877 233.17,138.877 233.17,-121.123 -26.83,-121.123 ; 123.17,-116.123 223.17,-116.123 ; 123.17,-116.123 123.17,-83.623 223.17,-83.623 223.17,-116.123 ; 223.17,-116.123 -76.83,-116.123 -76.83,133.877 223.17,133.877 223.17,-116.123 ; 23.17,133.877 23.17,138.877 23.17,133.877 ; 73.17,133.877 73.17,138.877 73.17,133.877 ; 123.17,133.877 123.17,138.877 123.17,133.877 ; 223.17,33.877 233.17,33.877 223.17,33.877
  text "NOTES:" at -16,121.5 h1.5
  text "1. BOARD TO BE FABRICATED PER IPC-A-600.CLASS 2 CURRENT VERSION" at -15.85,116.55 h1.5
  text "2. MATERIAL:  HIGH TEMP FR4 Tg150C OR GREATER" at -15.85,111.55 h1.5
  text "E" at -81.83,108.877 h1.5
  text "3. FINISH:    ELECTROLESS NICKEL/IMMERSION GOLD" at -15.95,106.45 h1.5
  text "4. SOLDERMASK:SOLDER MASK TO BE TRANSPARENT GREEN LPI BOTH SIDES" at -15.95,101.45 h1.5
  text "5. SILKSCREEN:WHITE NON-CONDUCTIVE EPOXY INK PER GERBER FILES" at -15.95,96.45 h1.5
  text "6. TRIM SILKSCREEN LINES ON OVERLAPING MASK" at -15.95,91.45 h1.5
  text "7. ALL DIMENSIONS ARE IN MILLIMETERS" at -15.95,86.45 h1.5
  text "8. REMOVE ALL UNUSED PADS FROM INTERNAL LAYERS" at -15.95,81.15 h1.5
  text "REFERING THE TABLE BELOW" at 44.05,81.15 h1.5
  text "9. TEARDROP PADS ARE ACCEPTABLE WHERE NEEDED" at -15.95,76.15 h1.5
  text "10. 100% ELECTRICAL TEST REQUIRED FOR CONDUCTIVITY." at -15.95,71.15 h1.5
  text "D" at -81.83,58.877 h1.5
  text "C" at -81.83,8.877 h1.5
  text "B" at -81.83,-41.123 h1.5
  text "DRAWN BY" at 143.17,-88.623 h1.5
  text ".ProjectDrawnBy" at 165.67,-88.623 h1.5
  text "A" at -81.83,-93.623 h1.5
  text "CHECKED BY" at 143.17,-93.623 h1.5
  text ".ProjectCheckedBy" at 165.67,-93.623 h1.5
  text "APPROVED BY" at 143.17,-98.623 h1.5
  text "COMPANY CONFIDENTIAL" at 193.17,-98.623 h1.5
  text "TITLE" at 125.67,-103.623 h1.5
  text ".ProjectName" at 143.17,-106.123 h1.5
  text ".Print_Time" at 155.3,-113.6 h1.5
  text ".pcbrevision" at 213.9,-113.6 h1.5
  text "DATE" at 125.67,-113.623 h1.5
  text ".Print_Date" at 143.17,-113.623 h1.5
  text "DOC" at 198.17,-113.623 h1.5
  text ".pcbname" at 205.67,-113.623 h1.5
  text "6" at -59.33,-118.623 h1.5
  text "5" at -1.83,-118.623 h1.5
  text "4" at 48.17,-118.623 h1.5
  text "3" at 98.17,-118.623 h1.5
  text "2" at 148.17,-118.623 h1.5
  text "1" at 205.67,-118.623 h1.5
Dimension:
  text ".Layer_Name" at 38.2,-54.3 h1.5
Logo:
  circle w0.254: c134.67,-88.423 r1
  circle w0.254: c134.67,-96.423 r1
  circle w0.254: c126.67,-92.423 r1
  lines w0.3: 126.767,-93.404 ccw(c131.67,-92.423) 133.746,-96.971 ; 126.771,-91.423 cw(c131.67,-92.423) 133.784,-87.892 ; 135.445,-89.145 cw(c131.67,-92.423) 135.452,-95.694
  text "PCB" at 129.67,-91.923 h1.52
  text "DESIGN" at 129.17,-93.923 h1
MechanicalExplanation:
  text ".Layer_Name" at 38.2,-54.3 h1.5
Free1:
  text ".Layer_Name" at 38.2,-54.3 h1.5
CommentTop:
  text ".Layer_Name" at 38.2,-54.3 h1.5
3DTop:
  text ".Layer_Name" at 38.2,-54.3 h1.5
AssemblyTop:
  text ".Layer_Name" at 38.2,-54.3 h1.5
CourtyardTop:
  text ".Layer_Name" at 38.2,-54.3 h1.5
MechanicalTop:
  text ".Layer_Name" at 38.2,-54.3 h1.5
Drill Drawing:
  circle w0.254: c100.794,7.407 r0.847
  lines w0.254: 99.947,-0.213 100.794,-1.06 101.641,-0.213 100.794,0.633 99.947,-0.213 ; 99.947,2.75 100.794,3.173 101.641,2.75 101.217,3.597 101.641,4.443 100.794,4.02 99.947,4.443 100.371,3.597 99.947,2.75 ; 99.947,12.063 101.641,12.063 100.794,10.37 99.947,12.063 ; 99.947,14.603 100.371,14.603 100.794,14.18 101.217,14.603 101.641,14.603 101.217,15.027 101.641,15.45 101.217,15.45 100.794,15.873 100.371,15.45 99.947,15.45 100.371,15.027 99.947,14.603
  lines w0.381: 98.429,-2.203 216.304,-2.203 ; 98.429,16.847 216.304,16.847 ; 112.421,-6.013 112.421,20.657 ; 127.403,-6.013 127.403,20.657 ; 157.112,-6.013 157.112,20.657 ; 169.962,-6.013 169.962,20.657 ; 200.179,-6.013 200.179,20.657 ; 98.429,-6.013 216.304,-6.013 216.304,20.657 98.429,20.657 98.429,-6.013
  text "Symbol" at 100.715,17.99 h1.83
  text "Count" at 113.564,17.99 h1.83
  text "Hole Size" at 128.546,17.99 h1.83
  text "Plated" at 158.255,17.99 h1.83
  text "Drill Layer Pair" at 171.105,17.99 h1.83
  text "Via/Pad" at 201.322,17.99 h1.83
  text "32" at 113.564,14.18 h1.52
  text "0,500mm (19,69mil)" at 128.546,14.18 h1.52
  text "PTH" at 158.255,14.18 h1.52
  text "TOP - BOTTOM" at 171.105,14.18 h1.52
  text "Via" at 201.322,14.18 h1.52
  text "16" at 113.564,10.37 h1.52
  text "1,050mm (41,34mil)" at 128.546,10.37 h1.52
  text "PTH" at 158.255,10.37 h1.52
  text "TOP - BOTTOM" at 171.105,10.37 h1.52
  text "Pad" at 201.322,10.37 h1.52
  text "24" at 113.564,6.56 h1.52
  text "1,100mm (43,31mil)" at 128.546,6.56 h1.52
  text "PTH" at 158.255,6.56 h1.52
  text "TOP - BOTTOM" at 171.105,6.56 h1.52
  text "Pad" at 201.322,6.56 h1.52
  text "68" at 113.564,2.75 h1.52
  text "1,150mm (45,28mil)" at 128.546,2.75 h1.52
  text "PTH" at 158.255,2.75 h1.52
  text "TOP - BOTTOM" at 171.105,2.75 h1.52
  text "Pad" at 201.322,2.75 h1.52
  text "2" at 113.564,-1.06 h1.52
  text "2,600mm (102,36mil)" at 128.546,-1.06 h1.52
  text "NPTH" at 158.255,-1.06 h1.52
  text "TOP - BOTTOM" at 171.105,-1.06 h1.52
  text "Pad" at 201.322,-1.06 h1.52
  text "142 Total" at 113.564,-4.87 h1.52
  text ".Layer_Name" at 38.2,-54.3 h1.5
CommentBottom:
  text ".Layer_Name" at 38.2,-54.3 h1.5
3DBottom:
  text ".Layer_Name" at 38.2,-54.3 h1.5
AssemblyBottom:
  text ".Layer_Name" at -3.8,-54.277 h1.5
CourtyardBottom:
  text ".Layer_Name" at 38.2,-54.3 h1.5
MechanicalBottom:
  text ".Layer_Name" at 38.2,-54.3 h1.5

## Dimensions
-10,50.95 to 40,50.95 on Dimension
40,50.95 to 40,3.2 on Dimension
40,3.2 to 27.85,0 on Dimension
-10,3.2 to 2.15,0 on Dimension
2.15,0 to 10.4,0 on Dimension
11.9,0 to 27.85,0 on Dimension
28.65,2.4 to 28.341,2.709 on Dimension
11.15,3.25 to 11.175,3.85 on Dimension
0,0 to -10,50.95 on Dimension
27.85,0 to 40,3.2 on Dimension